# EAGLE board Receiver SMD v1.0 (EAGLE 6.4)
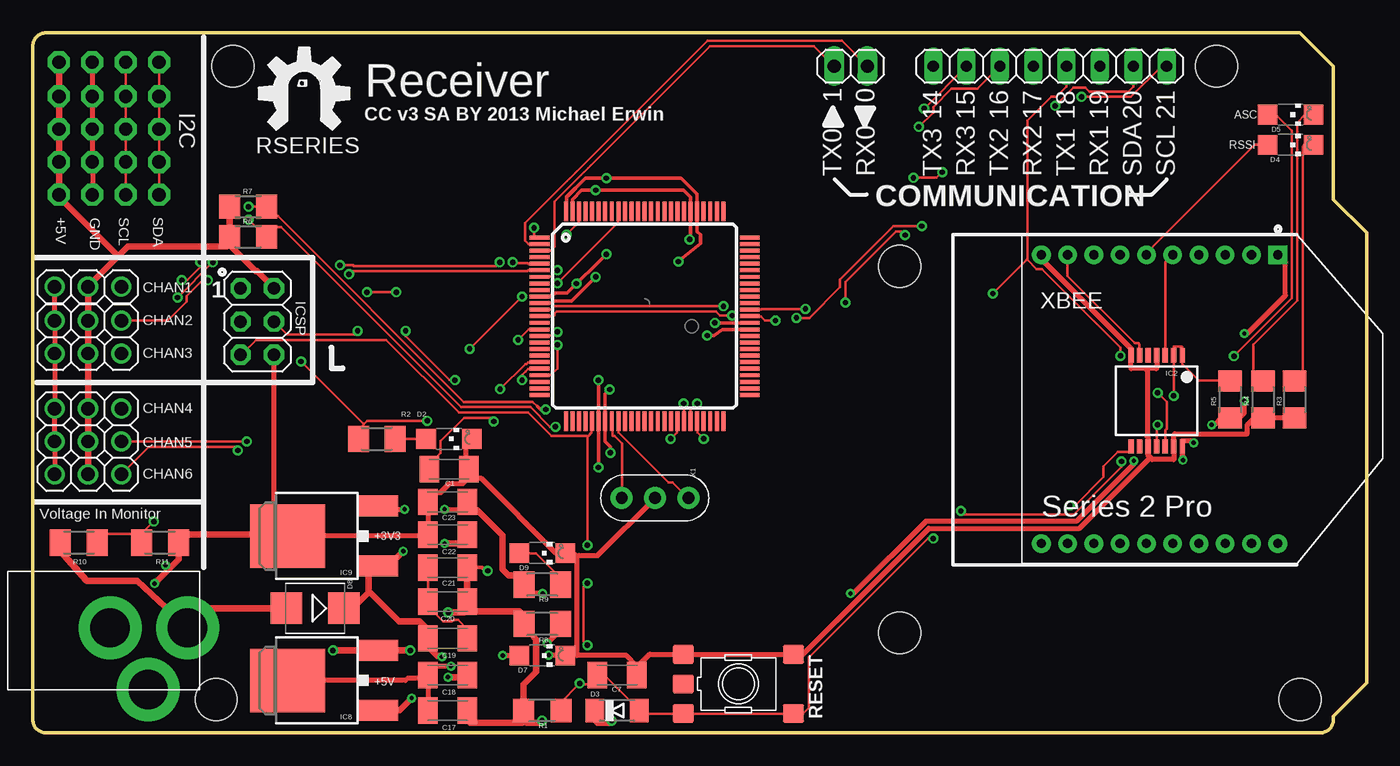
[diagram p0: board, top side]
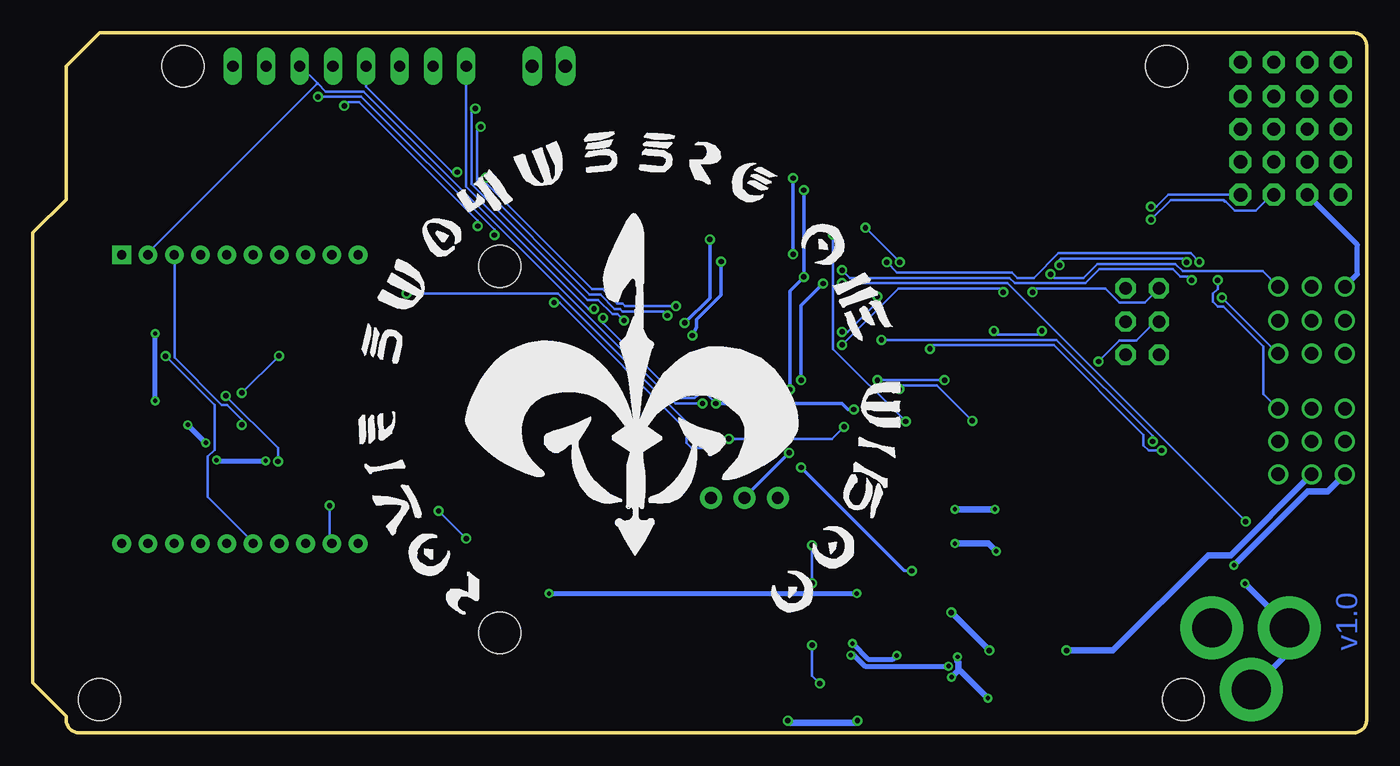
[diagram p1: board, bottom side, seen from below]

Size 101.6 x 53.34 mm. Coordinates in mm from the lower left corner, seen from the top.
Outline: 96.52,53.34 99.06,50.8 99.06,40.64 101.6,38.1 101.6,3.81 99.06,1.27 99.06,1 arc-90 98.06,0 1,0 arc-90 0,1 0,52.34 arc-90 1,53.34 96.52,53.34
Copper layers (1*16): Top 0.0356mm / dielectric 1.5011mm / Bottom 0.0356mm
Design rules "LaenPCBOrder *": minimum track width 6mil, minimum drill 13mil, track to track 6mil, track to pad 6mil, pad to pad 6mil, via to via 6mil, smd to smd 6mil, copper to edge 15mil, drill to drill 6mil, minimum pad ring 7mil, minimum via ring 7mil, stop-mask expansion 4mil, vias tented up to drill 16mil, thermal gap 10mil
Net classes: 0 default: width 0.203 mm, drill 0.406 mm, clearance 0.203 mm; 1 supply: width 0.508 mm, drill 0.152 mm, clearance 0.152 mm; 2 GND: width 0.508 mm, drill 0.305 mm, clearance 0.152 mm; 3 power usb: width 0.508 mm, drill 0.406 mm, clearance 0.203 mm
Holes 3.2 mm at 96.52,2.54 15.24,50.8 90.17,50.8 13.97,2.54 66.04,35.56 66.04,7.62

## Footprints (pad centres in the part's own frame; a part is rotated, then mirrored left to right if it is on the bottom)
C1206K = smd 1.5 x 2: 1 -1.5,0; 2 1.5,0
1X03 = drill 1.016: 1 -2.54,0; 2 0,0; 3 2.54,0
1X08 = drill 0.85 pad 1.422 long: 1 -8.89,0; 2 -6.35,0; 3 -3.81,0; 4 -1.27,0; 5 1.27,0; 6 3.81,0; 7 6.35,0; 8 8.89,0
CHIPLED_1206 = smd 1.5 x 1.5: A 0,-1.75; C 0,1.75
MINIMELF = smd 1.4 x 1.8: A 1.7,0; C -1.7,0
SMB = smd 2.4 x 2.4: A 2.2,0; C -2.2,0
1X04-CB = drill 1.016 pad 1.676 octagon: 1 -3.81,0; 2 -1.27,0; 3 1.27,0; 4 3.81,0
SSOP14 = smd 0.4 x 1.1: 1 -1.95,-3.475; 2 -1.3,-3.475; 3 -0.65,-3.475; 4 0,-3.475; 5 0.65,-3.475; 6 1.3,-3.475; 7 1.95,-3.475; 8 1.95,3.475; 9 1.3,3.475; 10 0.65,3.475; 11 0,3.475; 12 -0.65,3.475; 13 -1.3,3.475; 14 -1.95,3.475
TQFP100 = smd 1.5 x 0.3: 1 -8,6; 2 -8,5.5; 3 -8,5; 4 -8,4.5; 5 -8,4; 6 -8,3.5; 7 -8,3; 8 -8,2.5; 9 -8,2; 10 -8,1.5; 11 -8,1; 12 -8,0.5; 13 -8,0; 14 -8,-0.5; 15 -8,-1; 16 -8,-1.5; 17 -8,-2; 18 -8,-2.5; 19 -8,-3; 20 -8,-3.5; 21 -8,-4; 22 -8,-4.5; 23 -8,-5; 24 -8,-5.5; 25 -8,-6; 51 8,-6; 52 8,-5.5; 53 8,-5; 54 8,-4.5; 55 8,-4; 56 8,-3.5; 57 8,-3; 58 8,-2.5; 59 8,-2; 60 8,-1.5; 61 8,-1; 62 8,-0.5; 63 8,0; 64 8,0.5; 65 8,1; 66 8,1.5; 67 8,2; 68 8,2.5; 69 8,3; 70 8,3.5; 71 8,4; 72 8,4.5; 73 8,5; 74 8,5.5; 75 8,6 | smd 0.3 x 1.5: 26 -6,-8; 27 -5.5,-8; 28 -5,-8; 29 -4.5,-8; 30 -4,-8; 31 -3.5,-8; 32 -3,-8; 33 -2.5,-8; 34 -2,-8; 35 -1.5,-8; 36 -1,-8; 37 -0.5,-8; 38 0,-8; 39 0.5,-8; 40 1,-8; 41 1.5,-8; 42 2,-8; 43 2.5,-8; 44 3,-8; 45 3.5,-8; 46 4,-8; 47 4.5,-8; 48 5,-8; 49 5.5,-8; 50 6,-8; 76 6,8; 77 5.5,8; 78 5,8; 79 4.5,8; 80 4,8; 81 3.5,8; 82 3,8; 83 2.5,8; 84 2,8; 85 1.5,8; 86 1,8; 87 0.5,8; 88 0,8; 89 -0.5,8; 90 -1,8; 91 -1.5,8; 92 -2,8; 93 -2.5,8; 94 -3,8; 95 -3.5,8; 96 -4,8; 97 -4.5,8; 98 -5,8; 99 -5.5,8; 100 -6,8
DPAK = smd 1.6 x 3: 1 -2.28,-5.31; 3 2.28,-5.31 | smd 4.826 x 5.715: 4 0,1.588
2X03 = drill 0.95 pad 1.55 octagon: 1 -2.54,-1.27; 2 -2.54,1.27; 3 0,-1.27; 4 0,1.27; 5 2.54,-1.27; 6 2.54,1.27
PJ-102A = drill 3 pad 4.8: RING 0.1,-3.39; RING_SW -4.6,-6.29; TIP 0.1,-9.29
1X02 = drill 1.016 long: 1 -1.27,0; 2 1.27,0
R1206 = smd 1.6 x 1.803: 1 -1.422,0; 2 1.422,0
M1206 = smd 1.6 x 2: 1 -1.4,0; 2 1.4,0
TS42 = smd 1.6 x 1.4: 1 -4.2,2.25; 2 4.2,2.25; 3 -4.2,-2.25; 4 4.2,-2.25; 5 -4.2,0
CERM_OSC = drill 0.9 pad 1.676: P$1 -2.54,0; P$2 0,0; P$3 2.54,0
XBEE = drill 0.7 pad 1.422 square: 1 -11,5.5 | drill 0.7 pad 1.422: 2 -11,3.5; 3 -11,1.5; 4 -11,-0.5; 5 -11,-2.5; 6 -11,-4.5; 7 -11,-6.5; 8 -11,-8.5; 9 -11,-10.5; 10 -11,-12.5; 11 11,-12.5; 12 11,-10.5; 13 11,-8.5; 14 11,-6.5; 15 11,-4.5; 16 11,-2.5; 17 11,-0.5; 18 11,1.5; 19 11,3.5; 20 11,5.5

## Placement (x,y rotation side)
C1  0.1uF  [C1206K]  31.7,20.1 0 top
C7  22p  [C1206K]  44.5,4.4 0 top
C17  0.1uF  [C1206K]  31.6,1.7 180 top
C18  0.1uF  [C1206K]  31.6,4.4 180 top
C19  10uf 25V  [C1206K]  31.6,7.2 0 top
C20  10uf 25V  [C1206K]  31.6,10 180 top
C21  0.1uF  [C1206K]  31.6,12.6 180 top
C22  10uf 25V  [C1206K]  31.6,15.1 180 top
C23  0.1uF  [C1206K]  31.6,17.6 180 top
CHAN1  [1X03]  4.2,34 180 top
CHAN2  [1X03]  4.2,31.4 180 top
CHAN3  [1X03]  4.2,28.9 180 top
CHAN4  [1X03]  4.2,24.7 180 top
CHAN5  [1X03]  4.2,22.2 180 top
CHAN6  [1X03]  4.2,19.7 180 top
COMMUNICATION  8x1F-H8.5  [1X08]  77.47,50.8 180 top
D2  RED  [CHIPLED_1206]  31.7,22.4 270 top
D3  CD1206-S01575  [MINIMELF]  44.5,1.7 0 top
D4  [CHIPLED_1206]  95.8,44.8 270 top
D5  [CHIPLED_1206]  95.8,47.1 270 top
D7  [CHIPLED_1206]  38.8,5.9 270 top
D8  [SMB]  21.5,9.5 180 top
D9  [CHIPLED_1206]  38.8,13.7 270 top
I2C  [1X04-CB]  5.8,51.1 180 top
I2C1  [1X04-CB]  5.8,48.5 180 top
I2C2  [1X04-CB]  5.8,46 180 top
I2C3  [1X04-CB]  5.8,43.5 180 top
I2C4  [1X04-CB]  5.8,41 180 top
IC2  74ABT125DB  [SSOP14]  85.6,25.3 180 top
IC3  ATMEGA2560-16AU  [TQFP100]  46.6,31.75 0 top
IC8  LM2931_FIXED  [DPAK]  21,4 90 top
IC9  LM2931_FIXED  [DPAK]  21,15 90 top
ICSP  3x2M  [2X03]  17.1,31.34 270 top
J2  2.1MMJACK  [PJ-102A]  2.5,7.9 90 top
JP1  [1X02]  62.3,50.8 180 top
R1  10K  [R1206]  38.8,1.7 0 top
R2  1.0 K  [M1206]  26.2,22.4 180 top
R3  1K  [R1206]  96.1,25.4 90 top
R4  1K  [R1206]  93.7,25.4 90 top
R5  10K  [R1206]  91.2,25.4 90 top
R6  10K  [R1206]  16.4,37.8 180 top
R7  10K  [R1206]  16.4,40.1 180 top
R8  1.0 K  [M1206]  38.8,8.3 0 top
R9  1.0 K  [M1206]  38.8,11.3 0 top
R10  47.0 K  [M1206]  3.5,14.5 180 top
R11  24.0 K  [M1206]  9.7,14.5 180 top
RESET  TS42031-160R-TR-7260  [TS42]  53.74,3.73 0 top
U$1  ROYAL-ENGINEERS-OF-NABOO  [ROYAL-ENGINEERS-OF-NABOO]  77.17,7.72 0 bottom
U$3  RSERIES-OSHW-LOGO  [RSERIES-OSHW-LOGO-LARGE]  20.68,48.72 0 top
X1  16.00MHz  [CERM_OSC]  47.4,17.9 0 top
XBEE  XBEE  [XBEE]  89.33,25.43 270 top

## Library data of the parts
C1 C17 C18 C21 C23 D2 D4 D5 D7 D9 J2 R2 R8-R11 = minimidi
C7 COMMUNICATION IC3 ICSP RESET = SmartPrj
C19 C20 C22 = rcl
CHAN1-CHAN6 = adafruit3
D3 D8 = diode
I2C I2C1-I2C4 = carduino
IC2 = 74xx-us
IC8 IC9 = SparkFun-PowerIC
JP1 = pinhead
R1 R3-R7 = rcl-ez
U$1 U$3 = rseries
X1 = digg
XBEE = ulink

## Nets
5-GND: RESET.5
+5V [power usb]: C17.1 C20.1 C21.1 CHAN1.2 CHAN2.2 CHAN3.2 CHAN4.2 CHAN5.2 CHAN6.2 D3.C I2C1.4 I2C2.4 I2C3.4 I2C4.4 I2C.4 IC3.10 IC3.31 IC3.61 IC3.80 IC3.100 IC8.3 ICSP.2 R1.1 R6.2 R7.2 R8.1
+9V [supply]: C18.1 C19.1 C22.1 D8.C IC8.1 IC9.1
ADC0: IC3.97
ADC1: IC3.96
ADC2: IC3.95
ADC3: IC3.94
ADC4: IC3.93
ADC5: IC3.92 R10.1 R11.2
ADC6: IC3.91
ADC7: IC3.90
ADC8: IC3.89
ADC9: IC3.88
ADC10: IC3.87
ADC11: IC3.86
ADC12: IC3.85
ADC13: IC3.84
ADC14: IC3.83
ADC15: IC3.82
AREF: C1.1 IC3.98
GND [GND]: C1.2 C7.2 C17.2 C18.2 C22.2 C23.2 CHAN1.3 CHAN2.3 CHAN3.3 CHAN4.3 CHAN5.3 CHAN6.3 D2.C D7.C D9.C I2C1.3 I2C2.3 I2C3.3 I2C4.3 I2C.3 IC2.4 IC2.7 IC2.10 IC2.13 IC3.11 IC3.32 IC3.62 IC3.81 IC3.99 IC8.4 IC9.4 ICSP.6 J2.RING J2.RING_SW R3.1 R4.1 R11.1 RESET.1 RESET.2 X1.P$2 XBEE.10
N$4: IC2.11 XBEE.3
N$5: D5.C R4.2
N$6: IC2.5
N$7: D4.A XBEE.6
N$8: D4.C R3.2
N$9: D9.A R9.2
N$10: IC2.6 XBEE.9
N$11: D2.A R2.1
N$13: IC2.3 XBEE.5
N$21: IC2.9
N$22: IC2.8 XBEE.12
N$23: D5.A XBEE.15
N$28 [supply]: D7.A R8.2
N$29 [supply]: D8.A J2.TIP R10.2
N$30: C19.2 C20.2 C21.2
PA0: IC3.78
PA1: IC3.77
PA2: IC3.76
PA3: IC3.75
PA4: IC3.74
PA5: IC3.73
PA6: IC3.72
PA7: IC3.71
PB0: IC3.19
PB1: IC3.20 ICSP.3 R2.2
PB2: IC3.21 ICSP.4
PB3: IC3.22 ICSP.1
PB4: IC3.23
PB5: IC3.24
PB6: IC3.25
PB7: IC3.26
PC0: IC3.53
PC1: IC3.54
PC2: IC3.55
PC3: IC3.56
PC4: IC3.57
PC5: IC3.58
PC6: IC3.59
PC7: IC3.60
PD7: IC3.50
PE0: IC3.2 JP1.1
PE1: IC3.3 JP1.2
PE3: CHAN4.1 IC3.5
PE4: CHAN1.1 IC3.6
PE5: CHAN2.1 IC3.7
PG0: IC3.51
PG1: IC3.52
PG2: IC3.70
PG5: CHAN3.1 IC3.1
PH3: CHAN5.1 IC3.15
PH4: CHAN6.1 IC3.16
PH5: IC3.17
PH6: IC3.18
PL0: IC3.35
PL1: IC3.36
PL2: IC3.37
PL3: IC3.38
PL4: IC3.39
PL5: IC3.40
PL6: IC3.41
PL7: IC3.42
RESET: C7.1 D3.A IC2.1 IC2.2 IC3.30 ICSP.5 R1.2 R5.2 RESET.3 RESET.4
RTS: XBEE.16
RXD1: COMMUNICATION.3 IC3.45 XBEE.2
RXD2: COMMUNICATION.5 IC3.12
RXD3: COMMUNICATION.7 IC3.63
SCL: COMMUNICATION.1 I2C1.2 I2C2.2 I2C3.2 I2C4.2 I2C.2 IC3.43 R6.1
SDA: COMMUNICATION.2 I2C1.1 I2C2.1 I2C3.1 I2C4.1 I2C.1 IC3.44 R7.1
TXD1: COMMUNICATION.4 IC2.12 IC3.46
TXD2: COMMUNICATION.6 IC3.13
TXD3: COMMUNICATION.8 IC3.64
VCC [supply]: C23.1 IC2.14 IC9.3 R5.1 R9.1 XBEE.1
XTAL1: IC3.34 X1.P$3
XTAL2: IC3.33 X1.P$1

## Tracks (layer width: path | path; a pad name or v marks a point on that pad's centre or on a via)
+5V  (via drill 0.41)
  Top 0.254: IC3.61 52.96,30.73 52.53,30.73 51.87,30.28 v51.36,30.28 | v49.17,35.92 49.53,36.22 50.85,37.29 50.85,37.95 50.6,38.2 IC3.80 50.6,41.04 49.38,42.27 v43.69,42.27 | 40.64,39.79 IC3.100 40.64,39.79 | 40.64,39.79 40.64,40.79 | 40.64,40.79 40.64,40.84 42.11,42.27 | 42.11,42.27 42.16,42.27 | 42.16,42.27 v43.69,42.27 | 40.64,39.79 40.64,40.79 | 40.64,40.79 42.11,42.27 | 42.11,42.27 42.16,42.27 | 42.16,42.27 v43.69,42.27 | v43.69,36.47 40.69,33.53 | 40.69,33.53 39.78,33.53 39.49,33.25 IC3.10 38.63,33.27 39.42,33.27 39.67,33.53 40.69,33.53 | 40.69,33.53 v41.4,34.24 | v43.08,26.87 43.1,26.85 IC3.31 43.08,23.73 43.08,22.86 v43.08,20.22 | v34.65,12.34 34.19,12.6 C21.1
  Top 0.508: v44.09,0.94 43.92,0.76 43.03,0.76 42.8,0.99 42.8,1.68 D3.C | v38.79,0.94 38.61,0.76 37.62,0.76 37.44,0.94 | 37.44,0.94 37.39,0.99 37.39,1.68 R1.1 37.39,1.96 37.39,3.71 38.33,4.65 38.33,7.14 37.9,7.57 37.41,7.57 37.39,7.59 37.39,8.05 R8.1 37.39,8.94 37.06,9.27 33.12,9.27 33.1,9.3 33.1,9.75 C20.1 | C17.1 33.1,1.68 33.1,0.99 33.33,0.76 37.26,0.76 37.44,0.94 | C20.1 C21.1 | v28.75,6.27 IC8.3 26.06,6.27 v22.86,6.27 | v31.65,9.17 32.87,9.17 C20.1 | I2C.4 2.01,51.08 2.01,48.74 I2C1.4 2.01,48.49 2.01,46.25 I2C2.4 2.01,46 2.01,43.74 I2C3.4 2.01,43.48 2.01,41.02 I2C4.4 2.11,40.77 2.11,40.72 6.33,36.5 6.5,36.32 | R6.2 14.99,37.82 14.99,40.08 R7.2 | R6.2 14.99,37.54 14.99,37.16 16.97,35.18 17.09,35.18 18.39,33.88 ICSP.2 | CHAN6.2 4.22,19.71 4.22,22.2 CHAN5.2 4.22,22.45 4.22,24.69 CHAN4.2 4.22,24.94 4.22,28.65 CHAN3.2 4.22,28.91 4.22,31.39 CHAN2.2 4.22,31.65 4.22,33.98 CHAN1.2 4.37,34.19 6.5,36.32 | 6.5,36.32 7.21,37.03 14.76,37.03 R6.2
  Bottom 0.254: v49.17,35.92 49.17,33.38 51.05,31.5 51.05,30.94 v51.36,30.28 | v43.69,42.27 v43.69,36.47 | v41.4,34.24 43.08,32.56 v43.08,26.87 | v43.08,20.22 35.26,12.39 v34.65,12.34
  Bottom 0.508: v44.09,0.94 43.92,0.76 38.96,0.76 v38.79,0.94 | v31.65,9.17 v28.75,6.27 | v22.86,6.27 19.33,6.27 12.06,13.54 10.36,13.54 4.22,19.68 CHAN6.2
+9V  (via drill 0.33)
  Top 0.381: 27,12.72 IC9.1
  Top 0.508: v31.17,5.79 31.04,5.79 30.96,5.87 30.79,5.87 30.1,6.55 30.1,7.19 C19.1 30.1,7.44 30.1,7.85 29.46,8.48 27.91,8.48 25.81,10.59 25.58,10.72 | v31.62,4.24 33.1,4.24 C18.1 | v28.85,2.64 27.94,1.73 IC8.1 | v31.37,14.43 33.07,14.43 33.1,14.45 33.1,15.09 C22.1 | v28.22,13.84 27.18,12.8 IC9.1 26.06,12.72 25.6,12.72 25.58,12.7 25.58,10.72 | 25.58,10.72 24.36,9.5 23.72,9.5 D8.C
  Bottom 0.508: v31.17,5.79 31.17,5.46 31.09,5.38 31.09,4.78 | v31.62,4.24 31.09,4.78 | v28.85,2.64 30.86,4.65 31.09,4.78 | v31.37,14.43 28.8,14.43 v28.22,13.84
ADC5  (via drill 0.41)
  Top 0.203: v39.95,34.27 44.58,38.89 44.58,39.09 44.6,39.12 44.6,39.73 IC3.92 | v9.22,16.1 8.31,15.19 R11.2 8.23,15.16 4.93,15.16 4.9,15.14 R10.1
  Bottom 0.203: v39.95,34.27 27.38,34.27 v9.22,16.1
AREF  (via drill 0.41)
  Top 0.203: v40.64,37.95 41.58,38.89 41.58,39.09 41.6,39.12 41.6,39.73 IC3.98 | v35.1,23.72 34.82,24 32.84,24 31.06,22.23 31.06,21.31 30.58,20.83 30.23,20.83 30.2,20.8 30.2,20.12 C1.1
  Bottom 0.203: v40.64,37.95 40.64,29.26 v35.1,23.72
GND  (via drill 0.33, 0.41)
  Top 0.254: IC3.62 v51.94,31.24 | v50.04,37.59 50.1,37.65 IC3.81 50.1,40.83 49.58,41.35 v42.88,41.35 | IC3.99 | IC3.99 41.1,40.64 | 41.1,40.64 41.81,41.35 | 41.81,41.35 v42.88,41.35 | IC3.99 41.1,40.64 | 41.1,40.64 41.81,41.35 | 41.81,41.35 v42.88,41.35 | 41.05,32.92 v42.88,34.75 41.05,32.92 | 41.05,32.92 40.95,32.92 | 40.95,32.92 39.83,32.92 39.67,32.92 | 39.67,32.92 39.52,32.77 | 39.52,32.77 39.5,32.75 IC3.11 38.62,32.77 39.37,32.77 39.52,32.77 | 39.52,32.77 39.67,32.92 | 39.67,32.92 40.95,32.92 | 40.95,32.92 41.05,32.92 | v43.94,26.16 43.6,25.82 IC3.32 43.59,23.73 43.59,22.2 43.99,21.79 v43.99,21.34
  Top 0.381: I2C4.3 4.55,41.02 4.55,43.48 I2C3.3 4.55,43.69 4.55,46 I2C2.3 4.55,46.18 4.55,48.49 I2C1.3 4.55,48.69 4.55,51.08 I2C.3 | CHAN6.3 1.68,19.71 1.68,22.2 CHAN5.3 1.68,22.38 1.68,24.69 CHAN4.3 1.65,24.82 1.68,25.45 1.68,27.76 1.65,28.8 CHAN3.3 1.68,28.91 1.68,31.39 CHAN2.3 1.65,31.6 1.65,33.98 CHAN1.3 | 11.1,15.04 R11.1 | 18.69,15.04 18.72,15.01 IC9.4 | ICSP.6 18.36,28.78 18.36,15.21 IC9.4 | 5.97,8.18 J2.RING | R3.1 96.09,23.98 R4.1 93.52,23.98 93.04,23.98 92.51,23.44 92.51,22.81 92.48,22.78 86.97,22.78 86.92,22.73 86.92,22.25 86.89,22.23 86.89,22 IC2.13 86.89,21.44 86.92,21.41 86.92,20.85 86.89,20.83 85.27,20.83 85.11,20.98 | 85.11,20.98 84.94,21.16 84.94,21.82 IC2.10 84.94,22.02 84.94,22.5 84.89,22.55 84.89,27.58 84.89,27.76 | IC2.7 83.67,28.78 IC2.7 | 84.89,27.76 85.57,27.76 85.6,27.79 85.6,28.75 IC2.4 | 84.89,27.76 83.67,27.76 83.64,27.79 83.64,28.6 IC2.7 | XBEE.10 76.83,36.09 83.64,29.29 83.64,28.96 IC2.7 | D2.C 33.43,22.4 32.99,22.4 32.99,21.01 33.2,20.8 33.2,20.12 C1.2 | C1.2 33.2,19.91 33.2,19.46 32.74,19 31.75,19 31.06,18.31 30.12,18.31 30.1,18.29 30.1,17.78 C23.2 30.1,17.58 30.1,15.11 C22.2 29.92,15.01 19.61,15.01 IC9.4 | C17.2 C18.2 | 41.45,5.89 45.21,5.89 46,5.11 46,4.42 C7.2 46.18,5.18 46.99,5.99 49.53,5.99 RESET.1 49.71,5.99 57.94,5.99 RESET.2 58.12,5.99 58.65,5.99 68.25,15.6 79.73,15.6 84.99,20.85 85.11,20.98 | 41.45,5.89 40.56,5.89 D7.C 40.36,5.89 39.85,5.89 39.83,5.92 v39.29,5.92 | 41.45,13.44 41.2,13.69 40.56,13.69 D9.C 40.36,13.69 39.85,13.69 34.16,19.38 33.38,19.38 C1.2 | 41.45,13.44 41.45,6.07 41.45,5.89 | v31.85,5.08 30.12,5.08 30.1,5.05 30.1,4.57 C18.2
  Top 0.381: X1.P$2 47.4,17.88 43.03,13.51 41.63,13.51 41.45,13.44 | IC8.4 19.43,3.99 28.37,3.99 28.55,4.17 29.92,4.17 C18.2
  Top 0.508: IC9.4 18.21,15.11 11.28,15.11 R11.1 11.1,14.25 11.1,13.21 10.39,12.5 | v9.27,11.38 10.39,12.5 | v10.11,12.78 10.21,12.68 10.39,12.5
  Bottom 0.254: v51.94,31.24 50.04,33.15 v50.04,37.59 | v42.88,41.35 v42.88,34.75 43.94,33.68 v43.94,26.16 | v43.99,21.34 47.4,17.93 X1.P$2
  Bottom 0.381: I2C4.3 0.71,37.19 0.71,34.95 1.65,34.01 CHAN1.3 | v31.85,5.08 38.2,5.08 39.04,5.92 v39.29,5.92
  Bottom 0.508: v9.27,11.38 J2.RING 6.02,7.77 6.02,6.07 J2.RING_SW | v10.11,12.78 4.47,18.41 2.95,18.41 1.68,19.68 CHAN6.3
N$4  (via drill 0.41)
  Top 0.203: v85.67,23.47 85.6,23.39 85.6,21.84 IC2.11
  Bottom 0.203: v85.67,23.47 85.67,23.88 86.79,24.99 87.2,24.99 90.81,28.6 90.81,36.42 XBEE.3
N$5
  Top 0.203: D5.C 97.54,47.09 96.9,47.09 96.32,46.51 96.32,32.94 92.96,29.59 92.96,26.85 92.99,26.82 93.67,26.82 R4.2
N$7
  Top 0.203: D4.A 94.03,44.81 93.07,44.81 84.84,36.58 84.84,36.45 XBEE.6
N$8
  Top 0.203: D4.C 97.54,44.81 96.85,44.81 96.72,44.68 96.72,26.85 96.7,26.82 96.11,26.82 R3.2
N$9
  Top 0.203: D9.A 38.33,13.69 40.01,12.01 40.18,12.01 40.21,11.99 R9.2
N$10
  Top 0.203: IC2.6 84.3,29.59 84.2,29.69 83.95,29.69 78.82,34.82 78.82,36.42 XBEE.9
N$11
  Top 0.203: D2.A 27.64,22.4 27.61,22.43 27.58,22.4 R2.1
N$13
  Top 0.203: IC2.3 86.26,35.87 86.82,36.42 XBEE.5
N$22  (via drill 0.41)
  Top 0.203: v78.99,17.32 79.4,17.32 81.56,19.48 81.56,20.3 82.65,21.39 83.64,21.39 IC2.8
  Bottom 0.203: v78.99,17.32 78.99,14.58 78.84,14.43 XBEE.12
N$23  (via drill 0.41)
  Top 0.203: v91.49,28.7 95.91,33.12 95.91,45.87 94.69,47.09 D5.A
  Bottom 0.203: v91.49,28.7 87.76,24.97 87.76,21.57 88.27,21.06 88.27,17.98 84.84,14.55 XBEE.15
N$28  (via drill 0.33)
  Top 0.381: v35.79,5.89 37.03,5.89 D7.A | v39.17,6.81 39.93,7.57 40.18,7.57 40.21,7.59 40.21,8.28 R8.2
  Bottom 0.381: v35.79,5.89 36.07,5.61 37.97,5.61 v39.17,6.81
N$29
  Top 0.508: R10.2 2.11,14.48 2.11,13.84 4.12,11.58 7.95,11.58 J2.TIP 12.01,8.13 13.39,9.5 19.28,9.5 D8.A
N$30
  Top 0.203: C21.2 C20.2 30.1,9.91 30.1,9.3 30.12,9.27 30.48,9.27 31.27,8.48 31.95,8.48 32.08,8.61 32.38,8.61 33.1,7.9 33.1,7.21 C19.2
PB1  (via drill 0.41)
  Top 0.203: v35.59,26.19 37.52,28.12 37.62,28.12 37.72,28.22 37.95,28.22 37.97,28.25 38.58,28.25 IC3.20 | v30.05,23.77 25.48,23.77 25.21,23.51 | 25.21,23.51 24.79,23.09 R2.2 | v20.42,28.3 25.15,23.57 25.21,23.51
  Bottom 0.203: v35.59,26.19 35.31,26.47 32.74,26.47 v30.05,23.77 | v20.42,28.3 18.82,29.9 17.55,29.9 16.13,31.32 15.85,31.32 ICSP.3
PB2  (via drill 0.41)
  Top 0.203: v37.26,26.87 37.26,27.28 37.52,27.53 37.54,27.53 37.72,27.71 37.8,27.71 37.82,27.74 38.58,27.74 IC3.21 | v32.16,26.87 31.75,26.87 28.4,30.23 v28.4,30.63 | v24.74,30.63 24.46,30.35 19.36,30.35 18.39,31.32 ICSP.4
  Bottom 0.203: v32.16,26.87 v37.26,26.87 | v28.4,30.63 28.12,30.35 25.02,30.35 v24.74,30.63
PB3  (via drill 0.41)
  Top 0.203: v39.95,29.57 39.95,27.76 39.45,27.25 IC3.22 | v25.45,33.58 v27.69,33.58
  Bottom 0.203: v39.95,29.57 35.66,33.86 27.96,33.86 v27.69,33.58 | v25.45,33.58 25.17,33.86 19.89,33.86 18.82,32.79 16.92,32.79 15.85,33.86 ICSP.1
PE0
  Top 0.203: IC3.2 38.58,37.24 37.77,37.24 37.49,37.52 37.49,38.84 51.38,52.73 61.62,52.73 63.55,50.8 JP1.1
PE1
  Top 0.203: IC3.3 39.45,36.75 39.73,37.03 39.73,40.49 51.56,52.32 59.49,52.32 61.01,50.8 JP1.2
PE3  (via drill 0.41)
  Top 0.203: v36.55,35.87 36.6,35.81 37.69,35.81 37.77,35.74 38.58,35.74 IC3.5 | v12.75,35.89 12.75,35.48 11.76,34.49 v11.35,34.49
  Bottom 0.203: v36.55,35.87 35.76,35.08 27.03,35.08 26.62,34.67 25.35,34.67 23.47,36.55 13.41,36.55 v12.75,35.89 | v11.35,34.49 11.35,33.83 11.71,33.48 11.71,32.87 11.33,32.49 10.92,32.49 7.87,29.44 7.87,25.83 6.76,24.71 CHAN4.1
PE4  (via drill 0.41)
  Top 0.203: v24.08,34.95 24.31,35.18 37.69,35.18 37.77,35.26 38.58,35.26 IC3.6
  Bottom 0.203: v24.08,34.95 23.8,34.67 21.59,34.67 20.52,35.74 14.58,35.74 14.02,35.18 7.92,35.18 6.76,34.01 CHAN1.1
PE5  (via drill 0.41)
  Top 0.203: v39.95,35.26 39.47,34.77 39.24,34.77 39.22,34.75 IC3.7 | v13.34,34.49 12.93,34.49 11.71,33.27 11.71,32.87 10.26,31.42 6.76,31.42 CHAN2.1
  Bottom 0.203: v39.95,35.26 39.37,34.67 27.2,34.67 26.8,34.27 21.41,34.27 20.34,35.33 14.76,35.33 14.2,34.77 13.61,34.77 v13.34,34.49
PG5  (via drill 0.41)
  Top 0.203: v38.18,38.48 38.18,37.87 38.3,37.74 38.58,37.74 IC3.1 | v35.56,35.87 35.28,35.59 24.43,35.59 24.38,35.64 v23.39,35.64 | v11.02,33.17 v13.72,35.87
  Bottom 0.203: v35.56,35.87 v38.18,38.48 | v23.39,35.64 23.39,36.04 23.29,36.14 13.99,36.14 v13.72,35.87 | v11.02,33.17 6.76,28.91 CHAN3.1
PH3  (via drill 0.41)
  Top 0.203: v36.96,29.95 37.74,30.73 38.58,30.73 IC3.15 | v16.31,22.2 6.76,22.2 CHAN5.1
  Bottom 0.203: v36.96,29.95 23.65,29.95 16.31,22.61 v16.31,22.2
PH4  (via drill 0.41)
  Top 0.203: v39.95,30.56 39.75,30.56 39.47,30.28 39.24,30.28 39.22,30.25 IC3.16 | v33.27,29.26 v37.26,33.25 | v15.62,21.51 15.34,21.79 8.84,21.79 6.76,19.71 CHAN6.1
  Bottom 0.203: v39.95,30.56 39.55,30.56 37.26,32.84 v37.26,33.25 | v33.27,29.26 32.99,29.54 23.82,29.54 16.99,22.71 16.99,21.89 16.61,21.51 v15.62,21.51
RESET  (via drill 0.41)
  Top 0.203: 42.24,22.63 39.5,22.63 37.72,24.41 32.46,24.41 26.92,29.95 16.99,29.95 15.85,28.8 ICSP.5 | 42.24,22.63 42.32,22.63 42.57,22.89 42.57,23.09 42.6,23.11 42.6,23.72 IC3.30 | 41.66,3.68 42.98,3.68 43,3.71 C7.1 43,4.5 43,4.85 43.08,4.85 45.52,2.41 46.18,2.41 46.2,2.39 46.2,1.78 D3.A 46.2,1.68 46.2,1.47 RESET.3 49.63,1.47 RESET.4 58.04,1.47 58.65,1.47 59.11,1.93 59.11,5.74 68.17,14.81 v68.58,14.81 | 41.66,3.68 41.58,3.68 40.23,2.34 40.23,1.7 R1.2 | R5.2 91.19,26.82 90.5,26.82 90.47,26.85 88.82,26.85 87.55,28.12 87.55,28.68 IC2.1 87.55,29.41 87.53,29.44 86.92,29.44 86.89,29.41 IC2.2 86.89,28.68 v86.89,25.68 | v82.93,20.68 82.93,20.27 79.3,16.64 70.97,16.64 v70.69,16.92 | v42.24,14.3 42.24,22.55 42.24,22.63 | v42.24,11.4 41.96,11.12 41.96,6.96 v42.24,6.68 | v41.66,3.76 41.66,3.68
  Bottom 0.203: v86.89,25.68 82.93,21.72 v82.93,20.68 | v68.58,14.81 v70.69,16.92 | v42.24,11.4 v42.24,14.3 | v42.24,6.68 42.24,4.34 v41.66,3.76
RXD1  (via drill 0.41)
  Top 0.203: v50.6,25.09 50.09,24.59 50.09,23.75 IC3.45
  Bottom 0.203: v50.6,25.09 52.63,25.09 76.4,48.87 79.3,48.87 79.92,49.49 | 79.92,49.49 81.23,50.8 COMMUNICATION.3 | XBEE.2 92.81,36.45 92.81,36.6 79.98,49.43 79.92,49.49
RXD2  (via drill 0.41)
  Top 0.203: v52.6,32.51 39.7,32.51 39.45,32.26 IC3.12 | v67.08,42.29 68.83,42.29 v69.27,42.72
  Bottom 0.203: v52.6,32.51 56.49,32.51 56.69,32.72 57.1,32.72 58.19,33.81 59,33.81 67.08,41.88 v67.08,42.29 | v69.27,42.72 69.67,42.72 76.2,49.25 COMMUNICATION.5
RXD3  (via drill 0.41)
  Top 0.203: v56.57,31.42 55.78,31.42 55.47,31.73 55.24,31.73 55.22,31.75 IC3.63 | COMMUNICATION.7 v67.89,47.57
  Bottom 0.203: v56.57,31.42 57.05,31.9 57.45,31.9 58.55,32.99 59.36,32.99 68.17,41.81 68.17,47.3 v67.89,47.57
SCL  (via drill 0.41)
  Top 0.203: I2C4.2 7.09,41.02 7.09,43.48 I2C3.2 7.09,43.59 7.09,46 I2C2.2 7.09,46.1 7.09,48.49 I2C1.2 7.09,48.59 7.09,51.08 I2C.2 | v48.59,22.4 49.07,22.89 49.07,23.09 49.1,23.11 49.1,23.72 IC3.43 | v39.8,23.32 39.4,23.32 37.9,24.82 32.64,24.82 18.92,38.53 17.86,38.53 17.83,38.51 17.83,37.82 R6.1 17.75,38.56 16.97,38.56 v16.43,39.09 | COMMUNICATION.1 85.98,50.8 83.64,48.46 v79.88,48.46 | v66.45,37.92 66.17,38.2 65.73,38.2 61.9,34.37 v61.9,32.79
  Bottom 0.203: v39.8,23.32 40.72,22.4 v48.59,22.4 48.67,22.35 49.3,21.72 51.41,21.72 51.79,22.1 51.79,23.09 61.49,32.79 v61.9,32.79 | v79.88,48.46 76.58,48.46 66.45,38.33 v66.45,37.92 | v16.43,39.09 14.94,40.59 10.9,40.59 10.79,40.49 10.72,40.49 10.03,39.8 8.43,39.8 7.24,41 7.09,41 I2C4.2
SDA  (via drill 0.41)
  Top 0.203: I2C4.1 9.63,41.02 9.63,43.48 I2C3.1 9.63,43.59 9.63,46 I2C2.1 9.63,46.1 9.63,48.49 I2C1.1 9.63,48.59 9.63,51.08 I2C.1 | 49.33,24.87 49.34,24.85 | 49.34,24.85 49.61,24.59 IC3.44 | 38.43,24.87 38.08,25.22 32.82,25.22 18.67,39.37 17.86,39.37 17.83,39.4 17.83,40.08 R7.1 17.73,40.08 v16.43,40.08 | COMMUNICATION.2 83.82,49.23 83.46,48.87 80.47,48.87 80.19,49.15 79.25,49.15 v77.88,47.78 | v67.72,38.61 65.56,38.61 61.49,34.54 61.49,33.96 59.16,31.62 v58.17,31.62 | v49.58,25.09 49.4,24.92 49.34,24.85
  Top 0.254: 38.43,24.87 38.66,24.64 v39.06,24.64
  Bottom 0.203: v77.88,47.78 77.6,48.06 76.76,48.06 67.72,39.01 v67.72,38.61 | v58.17,31.62 58.17,31.22 52.45,25.5 51.18,25.5 50.9,25.78 50.27,25.78 v49.58,25.09 | v16.43,40.08 16.03,40.08 15.11,41 9.63,41 I2C4.1
  Bottom 0.254: v39.06,24.64 39.52,24.64 39.98,25.09 v49.58,25.09
TXD1  (via drill 0.41)
  Top 0.203: v85.67,25.91 86.36,25.22 86.36,23.16 86.26,23.06 86.26,21.84 IC2.12 | v82.86,28.73 82.86,29.36 76.86,35.36 76.45,35.36 75.74,36.07 | 75.74,36.07 75.74,46.63 77.57,48.46 77.98,48.46 78.74,49.23 COMMUNICATION.4 | v51.1,22.4 50.62,22.89 50.62,23.09 50.6,23.11 50.6,23.72 IC3.46 | v73.13,33.48 75.67,36.02 75.74,36.07
  Bottom 0.203: v82.86,28.73 v85.67,25.91 | v51.1,22.4 51.38,22.68 51.38,23.27 61.59,33.48 v73.13,33.48
TXD2  (via drill 0.41)
  Top 0.203: v53.26,31.8 52.32,31.8 52.02,32.11 39.88,32.11 39.73,31.95 39.73,31.83 39.7,31.8 39.5,31.8 39.47,31.77 39.24,31.77 39.22,31.75 IC3.13 | v67.49,46.18 68.58,47.27 68.58,47.68 69.98,49.07 71.93,49.07 COMMUNICATION.6
  Bottom 0.203: v53.26,31.8 53.57,32.11 56.67,32.11 56.87,32.31 57.28,32.31 58.37,33.4 59.18,33.4 67.77,41.99 67.77,45.9 v67.49,46.18
TXD3  (via drill 0.41)
  Top 0.203: v58.85,32.31 55.5,32.31 55.45,32.26 IC3.64
  Bottom 0.203: v58.85,32.31 59.26,32.31 68.58,41.63 COMMUNICATION.8
VCC  (via drill 0.33)
  Top 0.381: v31.37,17.04 33.1,17.04 33.1,17.58 C23.1 | v28.32,17.04 27.23,17.04 27,17.27 IC9.3 | IC2.14 87.55,21.84 IC2.14 | v88.42,22.1 88.27,22.25 87.55,22.25 87.55,22.02 IC2.14 | v89.79,23.47 89.99,23.47 90.5,23.98 91.19,23.98 R5.1 91.39,23.98 91.9,23.98 92.28,24.36 v92.28,25.3 | v92.28,30.43 92.51,30.43 95.4,33.33 95.4,35.87 94.84,36.42 XBEE.1 | v38.84,10.62 37.41,10.62 37.39,10.64 37.39,11.12 R9.1 | v62.28,10.62 62.51,10.62 68.02,16.13 79.5,16.13 83.87,20.5 v83.87,20.73 | v87.61,20.78 87.61,21.08 87.55,21.13 87.55,21.64 IC2.14
  Top 0.508: C23.1 33.27,16.97 33.88,16.97 35.79,15.06 35.79,12.45 36.22,12.01 37.36,12.01 37.39,11.99 37.39,11.48 R9.1
  Bottom 0.381: v89.79,23.47 v88.42,22.1 | v92.28,25.3 v92.28,30.43 | v62.28,10.62 v38.84,10.62 | v83.87,20.73 87.55,20.73 v87.61,20.78
  Bottom 0.508: v28.32,17.04 v31.37,17.04
XTAL1
  Top 0.203: IC3.34 44.6,23.72 44.6,23.11 44.63,23.09 44.63,22.89 48.41,19.1 48.74,19.1 X1.P$3
XTAL2
  Top 0.203: IC3.33 44.12,23.72 44.15,23.7 44.15,22.66 44.2,22.61 44.32,22.61 44.88,22.05 44.88,17.91 X1.P$1

## Text on the board
Bottom: v1.0
tPlace: 1 | 0 | 14 | 15 | 16 | 17 | 18 | 19 | 20 | 21 | RSERIES | Voltage In Monitor
tNames: Receiver | CC v3 SA BY 2013 Michael Erwin | ASC | RSSI | TX0 | RX0 | TX3 | RX3 | TX2 | RX2 | TX1 | RX1 | SDA | SCL | +5V | GND | SCL | SDA | 1 | +3V3 | +5V
ReferenceLC: ON | ON
tSilk: Series 2 Pro